# Altium PCB H743ZI_SD_LCD_DRAM_Dev.PcbDoc (part 2 of 2)
Units mm, origin at the board's own origin, x right, y up, seen from the top; angles counter-clockwise.
Board outline 91.52 x 133.34 mm, 2 copper layers (Top Layer, Bottom Layer); 88 components, 125 nets, 598 pads, 322 vias.
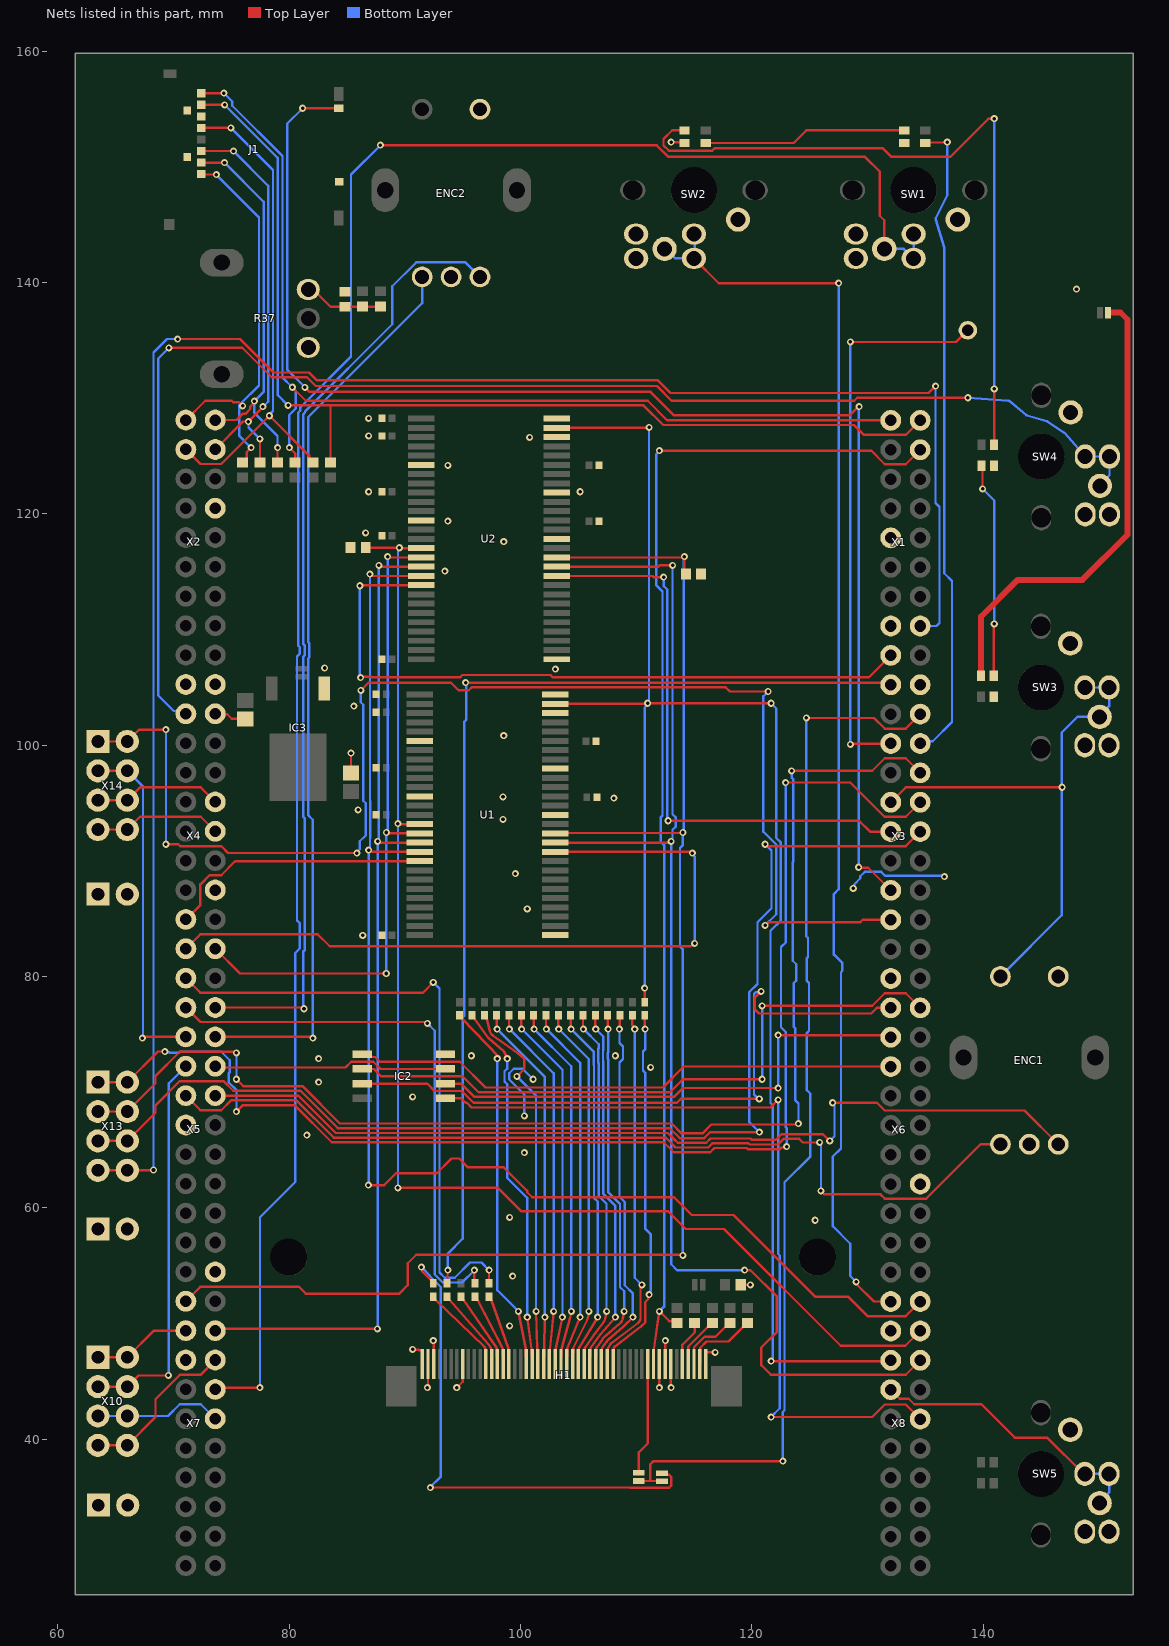
[diagram p2: the nets of this part, all layers, seen from the top]

## Via types
v1: diameter 0.61, hole 0.305, Top Layer to Bottom Layer, tented both sides, 322 vias

## Nets (pads, with @x,y where several pads share a name; then routed paths per layer and width w, separated by ;. In a path a pad name is that pad's centre, name@x,y a point inside that pad or via, vN(x,y) a via of type N, cw(c..) or ccw(c..) an arc to the next point about the centre after c; other vN are vias at no path point) (continued)
D15: R29.2 U1.53 U2.53 X8.5 | length 144.7
  Top Layer w0.203: U1.53@103.005,103.58 110.946,103.58 v1(110.998,103.632) v1(121.666,103.632) ; U2.53@103.124,127.442 111.065,127.442 v1(111.117,127.494) ; R29.2@110.744,77.791 v1(110.744,78.994) ; v1(121.666,46.736) 131.945,46.736 X8.5@132.024,46.815
  Bottom Layer w0.203: v1(110.744,78.994) 110.744,103.268 110.998,103.522 110.998,103.742 111.117,103.861 v1(111.117,127.494) ; v1(121.666,46.736) 121.666,46.846 121.818,46.998 121.818,68.865 121.615,69.068 121.615,83.953 122.52,84.857 122.52,91.587 122.113,91.994 122.113,103.185 v1(121.666,103.632)
GND: C1.2 C2.2 C3.2 C4.2 C5.2 C6.2 C7.2 C8.2 C9.2 C10.2 C11.2 C12.2 C13.2 C14.2 C17.1 C18.1 C19.1 ENC1.2 ENC1.C ENC2.2 ENC2.C H1.1 H1.2 H1.3 H1.8 H1.42 H1.43 H1.44 H1.50 IC2.4 IC3.1 J1.6 J1.9 J1.10 J1.12 R1.1 R2.1 R37.1 R38.1 SW1.2 SW1.S1 SW2.2 SW2.S1 SW3.2 SW3.S1 SW4.2 SW4.S1 SW5.S1 U1.6 U1.12 U1.28 U1.41 U1.46 U1.52 U1.54 U2.6 U2.12 U2.28 U2.41 U2.46 U2.52 U2.54 X1.9 X1.20 X2.8 X2.19 X2.20 X3.19 X4.2 X5.9 X5.20 X6.14 X8.3 X9.1 X9.2 X11.1 X11.2 X12.1 X12.2 | length 38.5
  Top Layer w0.203: X4.2@73.604,102.72 73.648,102.676 74.646,102.676 75.036,102.286 C19.1@76.2,102.286 ; C18.1@85.344,97.612 v1(85.344,99.314) ; v1(90.678,47.752) 90.702,47.728 91.21,47.728 91.258,47.68 91.456,47.68 91.504,47.632 H1.1@91.504,46.482 ; v1(91.948,44.45) 92.004,44.506 H1.2@92.004,46.482 ; v1(92.456,48.514) 92.504,48.466 H1.3@92.504,46.482 ; v1(94.488,44.45) 95.004,44.966 H1.8@95.004,46.482 ; H1.42@112.004,46.482 112.004,44.46 v1(112.014,44.45) ; H1.43@112.504,46.482 112.504,48.496 v1(112.522,48.514) ; H1.44@113.004,46.482 113.004,44.476 v1(113.03,44.45) ; v1(113.03,152.146) 114.113,152.146 SW2.2@114.185,152.074 ; H1.50@116.004,46.482 116.004,47.45 116.052,47.498 v1(116.84,47.498) ; C17.1@119.039,53.34 v1(119.888,53.34)
  Bottom Layer w0.203: v1(100.33,67.949) 100.33,69.793 99.031,71.092 99.031,71.639 99.418,72.026 100.186,72.026 v1(101.092,71.12) ; v1(128.778,87.63) 128.856,87.708 128.856,87.962 129.388,88.494 129.388,88.666 129.774,89.052 131.191,89.052 131.533,88.71 136.588,88.71 v1(136.652,88.646)
  other v1: 99.06,49.784 99.314,54.102 125.476,58.928 99.06,59.182 100.33,64.77 81.534,66.294 90.678,69.596 82.55,70.866 111.252,72.136 82.55,72.898 95.758,73.152 108.204,73.152 86.36,83.566 100.584,85.852 99.568,88.9 98.488,93.589 85.954,94.405 108.081,95.435 98.488,95.544 98.552,100.838 85.598,103.378 103.012,106.585 83.058,106.68 93.472,115.062 98.552,117.602 86.614,118.364 93.726,119.38 86.868,121.92 105.156,121.92 93.726,124.206 100.784,126.63 86.868,126.746 86.868,128.27 148.082,139.446
LDQM: R1.2 U1.15 U2.15 X8.4 | length 113.5
  Top Layer w0.203: R1.2@86.614,117.094 89.513,117.094 v1(89.527,117.08) 89.565,117.042 U2.15@91.424,117.042 ; v1(89.408,61.722) 98.044,61.722 100.076,59.69 112.776,59.69 114.3,58.166 117.602,58.166 127.698,48.07 133.28,48.07 X8.4@134.564,49.355 ; v1(89.408,93.218) 89.446,93.18 U1.15@91.305,93.18
  Bottom Layer w0.203: v1(89.408,61.722) v1(89.408,93.218) 89.408,116.851 89.527,116.97 v1(89.527,117.08)
MY_ADCON: SW4.S2 X4.1 | length 121.5
  Top Layer w0.203: v1(69.596,134.366) 75.946,134.366 78.486,131.826 81.534,131.826 82.296,131.064 111.794,131.064 113.064,129.794 128.86,129.794 129.114,130.048 v1(138.684,130.048)
  Bottom Layer w0.203: v1(69.596,134.366) 68.673,133.443 68.673,104.301 70.01,102.964 70.82,102.964 X4.1@71.064,102.72 ; v1(138.684,130.048) 142.175,129.799 cw(c142.16,129.596) 142.29,129.752 143.731,128.551 ; 143.732,128.551 ccw(c143.861,128.708) 143.804,128.512 145.511,128.025 ; 145.512,128.024 cw(c145.456,127.829) 145.568,127.998 147.043,127.015 cw(c146.931,126.846) 147.084,126.979 SW4.S2@148.834,124.968 SW4.S2@150.934,124.968 150.934,123.356 150.114,122.536 SW4.S2@150.114,122.428
MY_AUDIO_BOOT: ENC1.B X5.8 | length 80
  Top Layer w0.203: X5.8@73.604,69.7 80.805,69.7 84.028,66.476 112.73,66.476 113.352,65.854 113.368,65.854 113.598,65.624 116.065,65.624 116.43,65.989 119.886,65.989 119.988,65.888 122.095,65.888 122.574,66.367 126.165,66.367 v1(126.746,65.786) ; v1(127,69.088) 130.835,69.088 131.504,68.419 143.581,68.419 ENC1.B@146.5,65.5
  Bottom Layer w0.203: v1(126.746,65.786) 127.15,66.19 127.15,68.828 127,68.978 v1(127,69.088)
MY_AUDIO_RST: ENC1.A X5.7 | length 79.9
  Top Layer w0.203: X5.7@71.064,69.7 72.32,68.444 74.124,68.444 74.973,69.293 80.636,69.293 83.86,66.07 112.562,66.07 113.414,65.218 116.233,65.218 116.598,65.583 119.718,65.583 119.82,65.481 122.263,65.481 122.742,65.961 124.099,65.961 124.409,65.651 v1(125.875,65.651) ; v1(125.984,61.468) 126.289,61.163 131.14,61.163 131.504,60.799 135.084,60.799 139.785,65.5 ENC1.A@141.5,65.5
  Bottom Layer w0.203: v1(125.875,65.651) 125.875,65.541 125.984,65.432 v1(125.984,61.468)
MY_CHR1: SW2.S2 X8.1 | length 110.2
  Top Layer w0.203: SW2.S2@115,142.1 117.146,139.954 v1(127.508,139.954) ; v1(129.032,53.594) 129.11,53.516 129.11,53.344 130.559,51.895 X8.1@132.024,51.895
  Bottom Layer w0.203: SW2.S2@112.46,142.92 112.568,142.92 113.388,142.1 SW2.S2@115,142.1 115.062,142.162 115.062,144.018 115,144.08 SW2.S2@115,144.2 ; v1(127.508,139.954) 127.508,87.548 127.102,87.142 127.102,81.894 127.838,81.158 127.838,80.505 127.711,80.378 127.711,65.141 127,64.43 127,58.42 128.524,56.896 128.524,54.102 v1(129.032,53.594)
MY_CHR2: SW1.S2 X7.8 | length 172
  Top Layer w0.203: X7.8@73.604,44.3 73.754,44.45 v1(77.47,44.45) ; v1(87.884,151.892) 111.775,151.892 112.791,150.876 129.794,150.876 131.064,149.606 131.064,145.796 131.46,145.4 SW1.S2@131.46,142.92
  Bottom Layer w0.203: v1(77.47,44.45) 77.47,59.182 80.518,62.23 80.518,82.042 80.924,82.448 80.924,84.602 80.67,84.856 80.67,107.676 80.924,107.93 80.924,108.478 80.772,108.63 80.772,128.75 80.967,128.946 80.967,129.227 85.344,133.604 85.344,149.352 v1(87.884,151.892) ; SW1.S2@131.46,142.92 133.134,142.92 133.954,142.1 SW1.S2@134,142.1 SW1.S2@134,144.2
MY_CHST: ENC1.1 SW3.S2 X3.7 | length 47.5
  Top Layer w0.203: X3.7@132.024,95.075 133.308,96.359 146.828,96.359 v1(146.839,96.371)
  Bottom Layer w0.203: ENC1.1@141.5,80 146.812,85.312 146.812,101.092 148.18,102.46 SW3.S2@150.08,102.46 150.08,102.568 150.9,103.388 SW3.S2@150.9,105 SW3.S2@148.8,105
MY_FOOT1: SW5.S2 X8.7 | length 24.8
  Top Layer w0.203: X8.7@132.024,44.275 132.805,43.494 133.569,43.494 134.044,43.019 139.861,43.019 142.748,40.132 145.542,40.132 148.674,37 SW5.S2@148.8,37
  Bottom Layer w0.203: SW5.S2@148.8,37 SW5.S2@150.9,37 150.9,35.388 150.08,34.568 SW5.S2@150.08,34.46
MY_FOOT2: ENC2.A X5.4 | length 78.6
  Top Layer w0.203: X5.4@73.604,74.78 81.828,74.78 81.932,74.676 v1(82.042,74.676)
  Bottom Layer w0.203: v1(82.042,74.676) 82.042,93.554 81.636,93.96 81.636,107.492 81.737,107.594 81.737,108.814 81.636,108.916 81.636,128.372 91.5,138.236 ENC2.A@91.5,140.5
MY_FOOT3: ENC2.B X5.2 | length 82.5
  Top Layer w0.203: X5.2@73.604,77.32 81.176,77.32 v1(81.28,77.216)
  Bottom Layer w0.203: v1(81.28,77.216) 81.229,77.267 81.229,82.178 81.331,82.28 81.331,93.691 81.229,93.792 81.229,107.661 81.331,107.762 81.331,108.646 81.229,108.747 81.229,128.633 81.374,128.777 81.374,128.872 88.912,136.41 88.912,139.688 90.98,141.756 95.245,141.756 ENC2.B@96.5,140.5
MY_LCD_RESET: H1.41 R30.1 X1.4 | length 105.2
  Top Layer w0.203: H1.41@111.504,46.482 111.549,47.68 111.549,47.782 cw(c111.854,47.782) 111.552,47.825 v1(112.014,51.054) 112.877,50.191 113.385,50.191 R30.1@113.538,50.038 ; v1(112.014,125.476) 130.327,125.476 131.504,124.299 133.308,124.299 X1.4@134.564,125.555
  Bottom Layer w0.203: v1(112.014,51.054) 112.42,51.46 112.42,91.37 112.116,91.674 112.116,93.746 112.285,93.915 112.285,113.29 111.727,113.848 111.727,125.131 112.014,125.419 v1(112.014,125.476)
MY_LCD_TE_EXTI2: J3.2 J4.2 X3.2 | length 91.5
  Top Layer w0.203: J4.2@110.236,36.384 111.221,36.384 ; J3.2@112.268,36.322 112.206,36.384 111.221,36.384 ; v1(122.682,38.1) 111.506,38.1 111.221,37.815 111.221,36.384 ; v1(124.714,102.362) 130.581,102.362 131.504,101.439 133.308,101.439 X3.2@134.564,102.695
  Bottom Layer w0.203: v1(122.682,38.1) 122.682,42.351 122.834,42.504 122.834,62.21 125.07,64.446 125.07,69.87 124.765,70.174 124.765,75.122 124.956,75.313 124.956,79.432 124.766,79.622 124.766,81.603 124.866,81.703 124.866,83.332 124.714,83.484 v1(124.714,102.362)
MY_SD_DETECT: J1.11 X3.13 | length 121.2
  Top Layer w0.203: v1(81.17,155.084) J1.11@84.29,155.084 ; v1(81.358,130.951) 81.753,130.556 111.252,130.556 113.284,128.524 128.456,128.524 129.218,129.286 v1(129.286,129.286) ; v1(129.241,89.453) 129.286,89.408 130.071,89.408 X3.13@132.024,87.455
  Bottom Layer w0.203: v1(81.17,155.084) 79.823,153.737 79.823,132.487 v1(81.358,130.951) ; v1(129.241,89.453) 129.264,89.475 129.264,129.264 v1(129.286,129.286)
NE1: R10.2 X1.19 | length 89.5
  Top Layer w0.203: R10.2@93.662,53.474 93.694,53.506 93.694,54.578 v1(93.726,54.61) ; v1(95.25,105.41) 131.849,105.41 X1.19@132.024,105.235
  Bottom Layer w0.203: v1(93.726,54.61) 93.726,56.048 94.996,57.318 94.996,76.454 95.148,76.606 95.148,102.026 95.301,102.178 95.301,105.359 v1(95.25,105.41)
NE4: X7.5
NetH1_12: H1.12 R9.1 | length 7.7
  Top Layer w0.203: R9.1@92.456,52.324 92.654,52.051 96.865,48.002 cw(c96.654,47.782) 96.959,47.782 96.959,47.68 H1.12@97.004,46.482
NetH1_13: H1.13 R10.1 | length 7.2
  Top Layer w0.203: R10.1@93.662,52.324 93.861,52.051 97.189,48.251 cw(c96.654,47.782) 97.232,48.196 97.402,47.96 cw(c97.154,47.782) 97.459,47.782 97.459,47.68 H1.13@97.504,46.482
NetH1_14: H1.14 R11.1 | length 6.8
  Top Layer w0.203: R11.1@94.869,52.324 95.067,52.051 97.905,47.956 cw(c97.654,47.782) 97.959,47.782 97.959,47.68 H1.14@98.004,46.482
NetH1_15: H1.15 R12.1 | length 6.4
  Top Layer w0.203: R12.1@96.075,52.324 96.274,52.051 98.424,47.923 cw(c98.154,47.782) 98.459,47.782 98.459,47.68 H1.15@98.504,46.482
NetH1_16: H1.16 R13.1 | length 6.2
  Top Layer w0.203: R13.1@97.282,52.324 97.48,52.051 98.942,47.883 cw(c98.654,47.782) 98.959,47.782 98.959,47.68 H1.16@99.004,46.482
NetH1_19: H1.19 R14.1 | length 32.4
  Top Layer w0.203: R14.1@94.742,76.641 94.94,76.368 98.151,73.05 97.998,72.898 v1(97.993,72.898) ; v1(99.822,51.054) 99.934,50.429 ccw(c100.584,50.546) 99.936,50.416 100.453,47.842 cw(c100.154,47.782) 100.459,47.782 100.459,47.68 H1.19@100.504,46.482
  Bottom Layer w0.203: v1(97.993,72.898) 97.993,52.883 v1(99.822,51.054)
NetH1_20: H1.20 R15.1 | length 32.2
  Top Layer w0.203: R15.1@95.809,76.641 96.007,76.368 97.108,74.836 ccw(c97.974,75.458) 97.278,74.65 98.541,73.564 cw(c98.408,73.409) 98.594,73.492 v1(98.857,72.898) ; v1(100.584,50.546) 100.956,47.823 cw(c100.654,47.782) 100.959,47.782 100.959,47.68 H1.20@101.004,46.482
  Bottom Layer w0.203: v1(98.857,72.898) 98.857,72.039 98.625,71.807 98.625,70.924 98.857,70.692 98.857,62.586 100.584,60.858 v1(100.584,50.546)
NetH1_21: H1.21 R16.1 | length 32.7
  Top Layer w0.203: R16.1@96.876,76.641 97.074,76.368 97.333,75.302 ccw(c97.974,75.458) 97.594,74.918 99.694,73.438 cw(c99.314,72.898) 99.743,73.4 100.259,72.959 cw(c100.127,72.804) 100.33,72.804 100.33,72.004 v1(99.692,71.365) ; v1(101.346,51.054) 101.459,47.793 cw(c101.154,47.782) 101.459,47.782 101.459,47.68 H1.21@101.504,46.482
  Bottom Layer w0.203: v1(99.692,71.365) 101.346,69.711 v1(101.346,51.054)
NetH1_22: H1.22 R17.1 | length 31.9
  Top Layer w0.203: R17.1@97.942,76.641 97.942,75.49 v1(97.974,75.458) ; H1.22@102.004,46.482 102.049,47.68 102.049,47.782 cw(c102.354,47.782) 102.049,47.788 v1(102.108,50.546)
  Bottom Layer w0.203: v1(97.974,75.458) 102.108,71.324 v1(102.108,50.546)
NetH1_23: H1.23 R18.1 | length 31.7
  Top Layer w0.203: v1@99.009,75.49 R18.1@99.009,76.641 ; H1.23@102.504,46.482 102.549,47.68 102.549,47.782 cw(c102.854,47.782) 102.551,47.812 v1(102.87,51.054)
  Bottom Layer w0.203: v1(99.041,75.458) 102.87,71.629 v1(102.87,51.054)
NetH1_24: H1.24 R19.1 | length 31.6
  Top Layer w0.203: v1@100.076,75.49 R19.1@100.076,76.641 ; H1.24@103.004,46.482 103.049,47.68 103.049,47.782 cw(c103.354,47.782) 103.056,47.846 v1(103.632,50.546)
  Bottom Layer w0.203: v1(100.108,75.458) 103.632,71.934 v1(103.632,50.546)
NetH1_25: H1.25 R20.1 | length 31.6
  Top Layer w0.203: v1@101.143,75.49 R20.1@101.143,76.641 ; H1.25@103.504,46.482 103.549,47.68 103.549,47.782 cw(c103.854,47.782) 103.561,47.865 104.268,50.366 ccw(c103.632,50.546) 104.282,50.429 v1(104.394,51.054)
  Bottom Layer w0.203: v1(101.175,75.458) 104.394,72.239 v1(104.394,51.054)
NetH1_26: H1.26 R21.1 | length 31.6
  Top Layer w0.203: R21.1@102.21,76.641 102.21,75.49 v1(102.242,75.458) ; H1.26@104.004,46.482 104.049,47.68 104.049,47.782 cw(c104.354,47.782) 104.072,47.897 v1(105.156,50.546)
  Bottom Layer w0.203: v1(102.242,75.458) 105.156,72.544 v1(105.156,50.546)
NetH1_27: H1.27 R22.1 | length 31.5
  Top Layer w0.203: v1@103.276,75.49 R22.1@103.276,76.641 ; H1.27@104.504,46.482 104.549,47.68 104.549,47.782 cw(c104.854,47.782) 104.581,47.918 105.747,50.251 ccw(c105.156,50.546) 105.806,50.429 v1(105.918,51.054)
  Bottom Layer w0.203: v1(103.308,75.458) 105.918,72.848 v1(105.918,51.054)
NetH1_28: H1.28 R23.1 | length 31.5
  Top Layer w0.203: v1@104.343,75.49 R23.1@104.343,76.641 ; H1.28@105.004,46.482 105.049,47.68 105.049,47.782 cw(c105.354,47.782) 105.094,47.941 v1(106.68,50.546)
  Bottom Layer w0.203: v1(104.375,75.458) 106.324,73.509 106.324,72.373 106.356,72.341 106.356,60.863 106.68,60.54 v1(106.68,50.546)
NetH1_29: H1.29 R24.1 | length 31.6
  Top Layer w0.203: v1@105.41,75.49 R24.1@105.41,76.641 ; H1.29@105.504,46.482 105.549,47.68 105.549,47.782 cw(c105.854,47.782) 105.606,47.96 106.455,49.144 cw(c108.354,47.782) 106.484,49.183 107.208,50.15 ccw(c106.68,50.546) 107.33,50.429 v1(107.442,51.054)
  Bottom Layer w0.203: v1(105.442,75.458) 106.763,74.137 106.763,73.794 106.731,73.762 106.731,72.542 106.763,72.51 106.763,61.032 107.442,60.352 v1(107.442,51.054)
NetH1_30: H1.30 R25.1 | length 31.7
  Top Layer w0.203: H1.30@106.004,46.482 106.049,47.68 106.049,47.782 cw(c106.354,47.782) 106.106,47.96 106.785,48.907 cw(c108.354,47.782) 106.9,49.051 v1(108.204,50.546) ; R25.1@106.477,76.641 106.477,75.49 v1(106.509,75.458)
  Bottom Layer w0.203: v1(106.509,75.458) 107.169,74.798 107.169,73.626 107.137,73.594 107.137,72.71 107.169,72.678 107.169,61.2 108.204,60.165 v1(108.204,50.546)
NetH1_31: H1.31 R26.1 | length 31.7
  Top Layer w0.203: H1.31@106.504,46.482 106.549,47.68 106.549,47.782 cw(c106.854,47.782) 106.606,47.96 106.946,48.434 107.115,48.67 cw(c108.354,47.782) 107.354,48.932 108.636,50.047 ccw(c108.204,50.546) 108.854,50.429 v1(108.966,51.054) ; v1@107.544,75.49 R26.1@107.544,76.641
  Bottom Layer w0.203: v1(107.576,75.458) 107.576,73.458 107.544,73.426 107.544,72.878 107.576,72.846 107.576,61.368 108.61,60.334 108.61,53.136 108.966,52.781 v1(108.966,51.054)
NetH1_32: H1.32 R27.1 | length 32
  Top Layer w0.203: H1.32@107.004,46.482 107.049,47.68 107.049,47.782 cw(c107.354,47.782) 107.106,47.96 107.276,48.196 cw(c107.606,47.96) 107.277,48.197 107.446,48.433 cw(c108.354,47.782) 107.621,48.625 108.904,49.741 ccw(c108.204,50.546) 108.951,49.784 109.723,50.541 v1(109.718,50.546) ; v1(108.56,75.458) 108.585,75.484 108.585,76.616 R27.1@108.61,76.641
  Bottom Layer w0.203: v1(108.56,75.458) 108.56,74.266 108.864,73.961 108.864,72.878 108.56,72.574 108.56,60.959 109.017,60.502 109.017,53.305 109.718,52.604 v1(109.718,50.546)
NetH1_33: H1.33 R28.1 | length 31.8
  Top Layer w0.203: H1.33@107.504,46.482 107.549,47.68 107.549,47.782 cw(c107.854,47.782) 107.606,47.96 107.776,48.196 cw(c108.354,47.782) 107.925,48.349 110.126,50.019 ccw(c109.728,50.546) 110.189,50.073 110.201,50.085 ccw(c109.728,50.546) 110.378,50.429 110.378,53.018 110.412,53.052 110.412,53.262 v1(110.49,53.34) ; R28.1@109.677,76.641 109.677,75.771 109.88,75.568 v1(109.88,75.458)
  Bottom Layer w0.203: v1(109.88,75.458) 109.88,53.95 v1(110.49,53.34)
NetH1_34: H1.34 R29.1 | length 32
  Top Layer w0.203: H1.34@108.004,46.482 108.049,47.68 108.049,47.782 cw(c108.354,47.782) 108.17,48.025 110.373,49.696 ccw(c109.728,50.546) 110.475,49.784 110.784,50.094 110.784,51.856 111.055,52.127 111.055,52.423 v1(111.133,52.5) ; v1@110.744,75.49 R29.1@110.744,76.641
  Bottom Layer w0.203: v1(110.776,75.458) 110.776,73.697 110.592,73.513 110.592,71.862 110.776,71.678 110.776,58.216 111.252,57.74 111.252,52.823 111.211,52.781 111.211,52.578 v1(111.133,52.5)
NetH1_46: H1.46 R31.1 | length 4
  Top Layer w0.203: H1.46@114.004,46.482 114.004,48.169 115.062,49.226 R31.1@115.062,50.038
NetH1_47: H1.47 R32.1 | length 4.5
  Top Layer w0.203: H1.47@114.504,46.482 114.504,48.013 116.206,49.715 116.263,49.715 R32.1@116.586,50.038
NetH1_48: H1.48 R33.1 | length 5.4
  Top Layer w0.203: H1.48@115.004,46.482 115.004,47.938 115.915,48.849 116.871,48.849 118.06,50.038 R33.1@118.11,50.038
NetH1_49: H1.49 R34.1 | length 6.4
  Top Layer w0.203: H1.49@115.504,46.482 115.549,46.527 115.549,47.908 116.083,48.442 117.988,48.442 119.584,50.038 R34.1@119.634,50.038
NetJ3_1: J3.1 R9.2 | length 44.6
  Top Layer w0.203: v1(91.428,54.873) 91.506,54.795 91.506,54.499 92.456,53.549 R9.2@92.456,53.474 ; v1(92.202,35.814) 109.466,35.814 109.482,35.798 112.863,35.798 113.042,35.977 113.042,36.729 112.863,36.908 112.382,36.908 J3.1@112.237,37.053
  Bottom Layer w0.203: v1(91.428,54.873) 92.151,54.15 92.151,54.101 93.116,53.136 93.116,36.778 92.202,35.863 v1(92.202,35.814)
NetJ5_2: J5.2 SW3.4 | length 40.9
  Top Layer w0.508: SW3.4@139.826,106.015 139.826,111.124 143.002,114.3 148.59,114.3 152.492,118.202 152.492,136.814 151.892,137.414 151.13,137.414
NetR35_1: R35.1 R36.1 R37.3 R38.2 | length 6.9
  Top Layer w0.203: R37.3@81.65,139.406 82.082,139.406 83.566,137.922 R38.2@84.836,137.922 87.854,137.922 R36.1@87.884,137.952
NetSW1_1: SW1.1 SW2.3 | length 17.6
  Top Layer w0.203: SW2.3@116.015,152.074 123.626,152.074 124.726,153.174 SW1.1@133.185,153.174
NetSW2_1: SW2.1 SW4.3 | length 61.4
  Top Layer w0.203: SW2.1@114.185,153.174 113.124,153.174 112.37,152.42 112.37,151.872 112.823,151.419 116.591,151.419 116.81,151.638 131.318,151.638 132.08,150.876 137.16,150.876 140.462,154.178 v1(140.97,154.178) ; SW4.3@140.96,125.983 140.96,130.8 v1(140.97,130.81)
  Bottom Layer w0.203: v1(140.97,130.81) v1(140.97,154.178)
NetSW3_3: SW3.3 SW4.1 | length 18.7
  Top Layer w0.203: SW4.1@139.86,124.153 139.954,124.059 v1(139.954,122.174) ; SW3.3@140.97,106.059 SW3.3@140.926,106.015 140.926,110.446 v1(140.97,110.49)
  Bottom Layer w0.203: v1(139.954,122.174) 140.97,121.158 v1(140.97,110.49)
NOE: R13.2 X4.19 | length 54
  Top Layer w0.203: X4.19@71.064,79.86 72.32,78.604 91.558,78.604 v1(92.456,79.502) ; R13.2@97.282,53.474 v1(97.282,54.61)
  Bottom Layer w0.203: v1(92.456,79.502) 92.993,78.965 92.993,54.409 93.452,53.95 94.322,53.95 95.642,55.27 96.622,55.27 v1(97.282,54.61)
NWE: R12.2 X5.1 | length 48.7
  Top Layer w0.203: X5.1@71.064,77.32 72.32,76.064 91.83,76.064 v1(91.948,75.946) ; v1(96.012,54.61) 96.012,53.537 R12.2@96.075,53.474
  Bottom Layer w0.203: v1(91.948,75.946) 92.587,75.307 92.587,54.241 93.284,53.543 94.945,53.543 v1(96.012,54.61)
QUADSPI_BK1_IO0: IC2.5 X6.5 | length 47.6
  Top Layer w0.203: IC2.5@86.316,73.279 86.539,73.056 87.148,73.056 87.158,73.045 87.436,73.045 87.842,72.639 94.747,72.639 96.977,70.409 112.319,70.409 114.125,72.215 X6.5@132.024,72.215
QUADSPI_BK1_IO1: IC2.2 X6.3 | length 43.9
  Top Layer w0.203: IC2.2@93.516,70.739 94.869,70.739 96.012,69.596 113.284,69.596 114.046,70.358 v1(122.276,70.358) ; v1(122.276,74.93) 131.849,74.93 X6.3@132.024,74.755
  Bottom Layer w0.203: v1(122.276,70.358) v1(122.276,74.93)
QUADSPI_BK1_IO2: IC2.3 X5.6 | length 20.4
  Top Layer w0.203: X5.6@73.604,72.24 73.708,72.136 84.862,72.136 85.365,72.639 87.267,72.639 87.897,72.009 IC2.3@93.516,72.009
QUADSPI_BK1_IO3: IC2.7 X6.1 | length 59
  Top Layer w0.203: IC2.7@86.316,70.739 91.935,70.739 92.565,70.109 94.924,70.109 95.945,69.088 113.538,69.088 113.868,69.418 v1(120.646,69.418) ; v1(120.807,78.713) 120.244,78.15 120.244,77.196 120.63,76.81 130.338,76.81 130.823,77.295 X6.1@132.024,77.295
  Bottom Layer w0.203: v1(120.646,69.418) 120.574,69.418 120.193,69.799 120.193,78.486 120.36,78.653 120.747,78.653 v1(120.807,78.713)
QUADSPI_BK1_NCS: IC2.1 X8.10 | length 71
  Top Layer w0.203: IC2.1@93.516,69.469 94.869,69.469 95.25,69.088 95.371,69.088 95.777,68.682 121.615,68.682 v1(122.276,69.342) ; v1(121.666,41.91) 130.423,41.91 131.504,42.99 133.308,42.99 X8.10@134.564,41.735
  Bottom Layer w0.203: v1(121.666,41.91) 122.428,42.672 122.428,55.876 122.276,56.028 v1(122.276,69.342)
QUADSPI_CLK: IC2.6 X6.2 | length 56.9
  Top Layer w0.203: IC2.6@86.316,72.009 86.32,72.005 87.327,72.005 87.963,71.369 95.001,71.369 96.368,70.002 112.928,70.002 114.046,71.12 v1(120.904,71.12) ; v1(120.904,77.47) 130.423,77.47 131.504,78.55 133.308,78.55 X6.2@134.564,77.295
  Bottom Layer w0.203: v1(120.904,71.12) v1(120.904,77.47)
SD_CK: J1.5 R8.1 X2.3 | length 44.2
  Top Layer w0.203: X2.3@71.064,125.58 72.32,124.324 74.124,124.324 v1(78.294,128.494) 81.723,125.065 81.723,124.779 R8.1@82.042,124.46 ; J1.5@72.39,153.384 v1(74.962,153.384)
  Bottom Layer w0.203: v1(74.962,153.384) 78.603,149.743 78.603,128.913 78.294,128.604 v1(78.294,128.494)
SD_CMD: J1.3 R3.1 X2.4 | length 35.8
  Top Layer w0.203: J1.3@72.39,151.384 v1(75.184,151.384) ; X2.4@73.604,125.58 76.017,127.993 v1(76.477,127.993) 77.724,129.24 v1(77.724,129.286) ; R3.1@77.47,124.46 v1(77.47,126.492)
  Bottom Layer w0.203: v1(75.184,151.384) 78.197,148.371 78.197,129.713 v1@77.888,129.404 ; v1(76.477,127.993) 76.477,127.485 v1(77.47,126.492)
SD_D0: J1.7 R7.1 X1.2 | length 91.5
  Top Layer w0.203: J1.7@72.39,155.384 v1(74.419,155.384) ; v1(79.9,129.388) 83.566,129.388 ; R7.1@83.566,124.46 83.566,129.388 ; X1.2@134.564,128.095 133.308,126.839 129.701,126.839 128.852,127.688 112.342,127.688 110.642,129.388 83.566,129.388
  Bottom Layer w0.203: v1(74.419,155.384) 79.01,150.794 79.01,130.278 v1(79.9,129.388)
SD_D1: J1.8 R6.1 X1.1 | length 89.8
  Top Layer w0.203: J1.8@72.39,156.384 v1(74.353,156.384) ; v1(80.01,125.73) 80.518,125.222 R6.1@80.518,124.46 ; v1(80.271,130.958) 81.436,129.794 110.998,129.794 112.697,128.095 X1.1@132.024,128.095
  Bottom Layer w0.203: v1(74.353,156.384) 75.08,155.658 75.08,155.298 79.416,150.962 79.416,131.813 v1(80.271,130.958) 80.271,130.906 80.561,130.616 80.561,129.114 80.01,128.563 v1(80.01,125.73)
SD_D2: J1.1 R5.1 X2.1 | length 35.3
  Top Layer w0.203: X2.1@71.064,128.12 72.738,129.794 75.032,129.794 75.171,129.654 75.665,129.654 v1(75.972,129.347) ; J1.1@72.39,149.384 72.422,149.352 v1(73.711,149.352) ; R5.1@75.946,124.46 75.996,124.46 76.319,124.783 76.319,125.341 v1(76.708,125.73)
  Bottom Layer w0.203: v1(73.711,149.352) 73.711,149.301 77.384,145.628 77.384,131.118 v1@75.793,129.527 ; v1(75.972,129.347) v1@75.793,129.527 ; v1(76.708,125.73) 75.692,126.746 75.692,129.426 v1@75.793,129.527
SD_D3: J1.2 R4.1 X2.2 | length 34.8
  Top Layer w0.203: J1.2@72.39,150.384 v1(74.406,150.384) ; X2.2@73.604,128.12 75.436,128.12 75.969,128.653 76.212,128.653 76.633,129.074 76.633,129.291 76.994,129.652 v1(76.994,129.762) ; R4.1@78.994,124.46 v1(78.994,125.73)
  Bottom Layer w0.203: v1(74.406,150.384) 77.791,146.999 77.791,130.559 v1(76.994,129.762) 76.994,128.742 78.994,126.742 v1(78.994,125.73)
SDCKE0: U1.37 X4.17 | length 64.8
  Top Layer w0.203: X4.17@71.064,82.4 72.32,83.655 82.461,83.655 83.501,82.615 114.739,82.615 114.993,82.869 v1(115.062,82.869) ; U1.37@103.005,90.78 114.647,90.78 114.749,90.678 v1(114.859,90.678)
  Bottom Layer w0.203: v1(114.859,90.678) 114.859,90.568 115.062,90.365 v1(115.062,82.869)
SDCKE1: U2.37 X3.9 | length 50.2
  Top Layer w0.203: U2.37@103.124,114.642 111.413,114.642 111.515,114.54 v1(112.387,114.54) ; v1(112.776,93.472) 129.286,93.472 130.223,92.535 X3.9@132.024,92.535
  Bottom Layer w0.203: v1(112.387,114.54) 112.387,113.763 112.692,113.458 112.692,93.556 v1(112.776,93.472)
SDCLK: U1.38 U2.38 X8.6 | length 111.7
  Top Layer w0.203: U1.38@103.005,91.58 v1@112.806,91.58 ; U2.38@103.124,115.442 111.909,115.442 112.023,115.556 v1(113.149,115.556) ; v1(119.38,54.61) 119.888,54.61 122.174,52.324 122.174,49.276 120.818,47.92 120.818,46.396 121.655,45.559 133.308,45.559 X8.6@134.564,46.815
  Bottom Layer w0.203: v1(113.03,91.694) 113.03,55.118 113.538,54.61 v1(119.38,54.61) ; v1@113.149,91.923 113.149,92.691 113.436,92.978 113.436,93.746 113.149,94.033 v1(113.149,115.556)
SDNCAS: U1.17 U2.17 X7.4 | length 87.3
  Top Layer w0.203: X7.4@73.604,49.38 73.754,49.53 v1(87.63,49.53) ; v1(87.749,115.556) 87.859,115.556 87.973,115.442 U2.17@91.424,115.442 ; v1@87.854,91.58 U1.17@91.305,91.58
  Bottom Layer w0.203: v1(87.63,49.53) 87.647,49.547 87.647,61.713 87.66,61.726 87.66,62.274 87.647,62.287 v1(87.647,91.694) 87.647,91.804 87.749,91.906 v1(87.749,115.556)
SDNE0: U1.19 X4.15 | length 23.4
  Top Layer w0.203: X4.15@71.064,84.94 72.32,86.195 72.32,87.971 73.113,88.764 74.124,88.764 75.34,89.98 U1.19@91.305,89.98
SDNE1: U2.19 X1.17 | length 60.2
  Top Layer w0.203: v1(86.106,113.792) 86.156,113.842 U2.19@91.424,113.842 ; v1(86.173,105.851) 86.239,105.918 87.094,105.918 87.145,105.867 94.767,105.867 94.971,106.07 102.593,106.07 102.796,105.867 130.116,105.867 X1.17@132.024,107.775
  Bottom Layer w0.203: v1(86.106,113.792) 86.106,105.918 v1(86.173,105.851)
SDNRAS: U1.18 U2.18 X8.2 | length 116.5
  Top Layer w0.203: v1(86.841,61.96) 88.208,61.96 89.24,62.992 92.756,62.992 93.951,64.187 93.966,64.187 94.045,64.266 94.706,64.266 95.472,63.5 98.552,63.5 100.584,61.468 100.584,61.345 101.019,60.909 113.281,60.909 114.805,59.385 118.415,59.385 125.476,52.324 128.334,52.324 130.019,50.639 133.308,50.639 X8.2@134.564,51.895 ; v1(86.987,114.794) 87.097,114.794 87.249,114.642 U2.18@91.424,114.642 ; v1@87.13,90.78 U1.18@91.305,90.78
  Bottom Layer w0.203: v1(86.841,61.96) 86.868,61.987 v1(86.868,90.932) 86.868,91.042 86.987,91.161 86.987,92 87.02,92.034 87.02,95.164 86.987,95.198 v1(86.987,114.794)
SDNWE: U1.16 U2.16 X4.18 | length 57.6
  Top Layer w0.203: X4.18@73.604,82.4 75.74,80.264 v1(88.392,80.264) ; v1(88.409,92.456) 88.485,92.38 U1.16@91.305,92.38 ; v1(88.511,116.318) 88.587,116.242 U2.16@91.424,116.242
  Bottom Layer w0.203: v1(88.392,80.264) 88.392,92.439 v1(88.409,92.456) 88.409,92.566 88.511,92.668 v1(88.511,116.318)
SPI1_MISO: X7.3 X10.1 X10.2 | length 8.6
  Top Layer w0.203: X10.1@63.46,47.08 X10.2@66,47.08 68.3,49.38 X7.3@71.064,49.38
SPI1_MOSI: X5.5 X10.3 X10.4 | length 33.9
  Top Layer w0.203: X10.3@63.46,44.54 X10.4@66,44.54 66.964,45.504 v1(69.558,45.504)
  Bottom Layer w0.203: v1(69.558,45.504) 69.596,45.541 69.596,70.772 X5.5@71.064,72.24
SPI1_NSS: X7.6 X10.7 X10.8 | length 14.1
  Top Layer w0.203: X10.7@63.46,39.46 X10.8@66,39.46 68.444,41.904 68.444,43.455 70.544,45.555 72.32,45.555 X7.6@73.604,46.84
SPI1_SCK: X7.10 X10.5 X10.6 | length 11.1
  Bottom Layer w0.203: X10.5@63.46,42 X10.6@66,42 69.528,42 70.544,43.015 72.348,43.015 X7.10@73.604,41.76
SPI2_MISO: X3.8 X13.1 X13.2 | length 112.6
  Top Layer w0.203: X13.1@63.46,70.866 X13.2@66,70.866 68.647,73.513 v1(69.246,73.513) ; v1(75.438,68.326) 75.997,68.885 80.467,68.885 83.689,65.663 112.391,65.663 112.776,65.278 112.779,65.278 113.246,64.811 116.405,64.811 116.77,65.176 119.55,65.176 119.651,65.075 122.431,65.075 122.579,65.222 122.938,65.222 v1(123.016,65.3) ; v1(122.936,96.774) 128.524,96.774 131.479,93.819 133.308,93.819 X3.8@134.564,95.075
  Bottom Layer w0.203: v1(69.246,73.513) 69.318,73.441 69.63,73.441 69.664,73.406 70.454,73.406 70.544,73.495 74.124,73.495 74.86,72.76 74.86,71.72 74.778,71.638 74.778,70.846 75.438,70.186 v1(75.438,68.326) ; v1(122.936,96.774) 122.936,82.956 122.53,82.55 122.53,75.61 122.936,75.204 122.936,66.954 123.016,66.875 v1(123.016,65.3)
SPI2_MOSI: X3.6 X13.3 X13.4 | length 110.8
  Top Layer w0.203: X13.3@63.46,68.326 X13.4@66,68.326 68.444,70.77 68.444,71.395 70.544,73.495 75.239,73.495 75.328,73.406 v1(75.438,73.406) ; v1(75.438,71.12) 76.034,70.524 81.146,70.524 84.381,67.289 113.083,67.289 113.935,66.437 115.728,66.437 116.5,67.208 123.969,67.208 v1(124.039,67.279) ; v1(123.444,97.79) 130.423,97.79 131.504,98.87 133.308,98.87 X3.6@134.564,97.615
  Bottom Layer w0.203: v1(75.438,71.12) v1(75.438,73.406) ; v1(123.444,97.79) 123.444,97.2 123.596,97.048 123.596,89.941 123.546,89.891 123.546,81.368 123.85,81.064 123.85,79.647 123.635,79.432 123.635,75.654 123.749,75.54 123.749,69.322 124.039,69.032 v1(124.039,67.279)
SPI2_NSS: X1.16 X13.7 X13.8 | length 168.2
  Top Layer w0.203: X13.7@63.46,63.246 X13.8@66,63.246 66.012,63.258 68.254,63.258 v1(68.267,63.271) ; v1(70.358,135.128) 75.759,135.128 78.654,132.232 81.702,132.232 82.363,131.572 111.861,131.572 112.979,130.454 135.28,130.454 v1(135.89,131.064)
  Bottom Layer w0.203: v1(68.267,63.271) 68.267,133.97 69.424,135.128 v1(70.358,135.128) ; X1.16@134.564,110.315 135.969,110.315 136.236,110.582 136.236,120.595 135.89,120.941 v1(135.89,131.064)
SPI2_SCK: X3.10 X13.5 X13.6 | length 102.2
  Top Layer w0.203: X13.5@63.46,65.786 X13.6@66,65.786 68.444,68.23 68.444,68.855 70.544,70.955 74.333,70.955 75.171,70.117 80.978,70.117 84.212,66.883 112.914,66.883 113.766,66.03 115.897,66.03 116.414,66.548 v1(120.65,66.548) ; v1(121.158,91.44) 121.268,91.44 121.429,91.279 133.308,91.279 X3.10@134.564,92.535
  Bottom Layer w0.203: v1(120.65,66.548) 119.786,67.412 119.786,78.654 120.498,79.366 120.498,84.703 121.707,85.912 121.707,90.891 v1(121.158,91.44)
TIM8_CH1N: X1.15
TIM8_CH2N: X4.14
TIM8_CH3N: SW1.3 X3.4 | length 56.2
  Top Layer w0.203: SW1.3@135.015,152.074 135.363,152.087 v1(136.906,152.146)
  Bottom Layer w0.203: X3.4@134.564,100.155 134.753,100.344 135.65,100.344 137.312,102.006 137.312,114.206 136.652,114.867 136.652,142.972 ccw(c136.449,142.972) 136.643,143.031 135.913,145.465 ; 135.913,145.465 cw(c136.108,145.523) 135.926,145.614 136.885,147.531 ccw(c136.703,147.622) 136.906,147.622 v1(136.906,152.146)
UART4_RX: X4.10 X14.7 X14.8 | length 11.1
  Top Layer w0.203: X14.7@63.46,92.71 X14.8@66,92.71 67.105,93.815 72.348,93.815 X4.10@73.604,92.56
UART4_TX: X4.8 X14.5 X14.6 | length 11.1
  Top Layer w0.203: X14.5@63.46,95.25 X14.6@66,95.25 67.105,96.355 72.348,96.355 X4.8@73.604,95.1
UDQM: R2.2 U1.39 U2.39 X7.1 | length 130.7
  Top Layer w0.203: X7.1@71.064,51.92 72.32,53.175 80.844,53.175 81.434,52.585 89.526,52.585 90.256,53.315 90.256,55.21 90.986,55.94 113.986,55.94 v1(114.046,55.88) ; U1.39@103.005,92.38 103.043,92.418 114.008,92.418 v1(114.046,92.456) ; U2.39@103.124,116.242 114.089,116.242 v1(114.165,116.318) 114.165,114.943 R2.2@114.3,114.808
  Bottom Layer w0.203: v1(114.046,55.88) 114.046,82.335 113.792,82.589 113.792,91.12 114.046,91.374 v1(114.046,92.456) 114.105,92.515 114.105,116.258 v1(114.165,116.318)
USART2_RX: X5.3 X14.3 X14.4 | length 30
  Top Layer w0.203: X14.3@63.46,97.79 X14.4@66,97.79 ; v1(67.31,74.676) 67.42,74.676 67.524,74.78 X5.3@71.064,74.78
  Bottom Layer w0.203: X14.4@66,97.79 67.356,96.434 67.356,74.722 v1(67.31,74.676)
USART2_TX: X3.15 X14.1 X14.2 | length 115.9
  Top Layer w0.203: X14.1@63.46,100.33 X14.2@66,100.33 67.016,101.346 v1(69.342,101.346) ; v1(69.342,91.44) 70.408,91.44 70.573,91.275 74.124,91.275 74.722,90.678 v1(85.852,90.678) ; v1(86.193,104.75) 86.208,104.75 86.868,105.41 93.98,105.41 94.64,104.75 95.524,104.75 95.778,105.004 117.754,105.004 118.11,104.648 v1(121.412,104.648) ; v1(121.158,84.43) 121.226,84.43 121.48,84.684 129.372,84.684 129.604,84.915 X3.15@132.024,84.915
  Bottom Layer w0.203: v1(69.342,91.44) v1(69.342,101.346) ; v1(85.852,90.678) 85.852,90.746 86.106,91 86.106,91.694 86.614,92.202 86.614,94.996 86.403,95.207 86.403,103.506 86.193,103.717 v1(86.193,104.75) ; v1(121.158,84.43) 122.113,85.385 122.113,91.419 121.006,92.526 121.006,104.242 v1(121.412,104.648)
USB_OTG_FS_SOF: TP1.1 X3.3 | length 48.9
  Top Layer w0.203: v1(128.524,100.076) 128.563,100.115 131.985,100.115 X3.3@132.024,100.155 ; v1(128.524,134.874) 137.668,134.874 TP1.1@138.684,135.89
  Bottom Layer w0.203: v1(128.524,100.076) v1(128.524,134.874)
VSYNC: H1.40 J4.1 | length 9.7
  Top Layer w0.203: J4.1@110.236,37.084 110.236,38.862 111.004,39.63 H1.40@111.004,46.482
pads on no net: ENC1.MT1 ENC1.MT2 ENC2.1 ENC2.MT1 ENC2.MT2 H1.4 H1.5 H1.6 H1.7 H1.17 H1.18 H1.35 H1.36 H1.37 H1.38 H1.39 H1.MP1 J1.MP1 J1.MP2 J1.MP3 J1.MP4 R37.MT1 SW1. SW2. SW3. SW3.1 SW4. SW5. SW5.1 SW5.2 SW5.3 SW5.4 U1.36 U1.40 U2.36 U2.40 X1. X1.3 X1.5 X1.6 X1.7 X1.11 X1.12 X1.14 X1.18 X2. X2.5 X2.6 X2.7 X2.9 X2.10 X2.11 X2.12 X2.13 X2.14 X2.15 X2.18 X3. X3.1 X3.5 X3.11 X3.12 X3.14 X3.17 X4. X4.3 X4.4 X4.5 X4.6 X4.7 X4.9 X4.11 X4.12 X4.13 X4.16 X4.20 X5. X5.14 X5.16 X6. X7. X7.7 X7.11 X7.12 X7.13 X7.14 X7.15 X7.16 X7.17 X7.18 X7.19 X7.20 X8. X8.11 X8.12 X8.13 X8.14 X8.15 X8.16 X8.17 X8.18 X8.19 X8.20

## Polygon pours and split planes (outlines as drawn)
GND on Top Layer "NONET_L02_P-001" (solid, remove dead copper, pour order 1): 61.479,160.02 61.479,26.416 153.162,26.416 153.162,160.02
+5V on Top Layer "NONET_L02_P-001" (solid, remove dead copper, pour order 0): 69.342,103.378 70.104,102.616 74.676,102.616 75.692,103.632 78.74,103.632 78.994,103.886 78.994,106.172 75.184,109.982 70.866,109.982 69.342,108.458
GND on Bottom Layer "NONET_L02_P-001" (solid, remove dead copper, pour order 2): 61.479,160.02 61.479,26.67 153.162,26.67 152.908,26.924 152.908,160.02

## Silkscreen, mask and mechanical layers (free items; w line width, h text height)
Top Overlay:
  text "Param" at 102.746,140.254 h1.52 r90
  text "RGB current" at 150.634,138.582 h0.76 r90
  text "Up" at 115.238,137.254 h1.52 r90
  text "Dn" at 134.746,137.254 h1.52 r90
  text "USB_SOF" at 141.199,134.264 h0.76 r90
  text "N" at 139.746,115.254 h1.52 r90
  text "USART2" at 62.636,111.404 h0.76
  text "TX" at 62.636,110.134 h0.76
  text "RX" at 62.636,108.864 h0.76
  text "UART4" at 62.636,106.578 h0.76
  text "TX" at 62.636,105.308 h0.76
  text "RX" at 62.636,104.038 h0.76
  text "Y" at 139.746,95.254 h1.52 r90
  text "GND" at 62.342,88.634 h0.76
  text "-USART2-" at 62.636,81.94 h0.76
  text "Sel" at 139.746,81.254 h1.52 r90
  text "TX" at 62.636,80.67 h0.76
  text "RX" at 62.636,79.4 h0.76
  text "-UART4-" at 62.636,77.114 h0.76
  text "TX" at 62.636,75.844 h0.76
  text "RX" at 62.636,74.574 h0.76
  text "GND" at 62.342,59.678 h0.76
  text "-SPI1-" at 62.636,54.344 h0.76
  text "MISO" at 62.636,53.074 h0.76
  text "MOSI" at 62.636,51.804 h0.76
  text "SCK" at 62.636,50.534 h0.76
  text "NSS" at 62.636,49.264 h0.76
  text "TX" at 62.636,46.978 h0.76
  text "FootSW" at 139.746,46.254 h1.52 r90
  text "RX" at 62.636,45.708 h0.76
  text "VSYNC" at 105.308,36.474 h0.76
  text "TE" at 113.69,36.31 h0.76
  text "GND" at 62.382,35.802 h0.76
Board Shape:
  lines w0.1: 61.479,26.521 61.479,28.521 61.479,157.861 61.479,159.861 67.818,159.861 69.818,159.861 135.818,159.861 153,159.861 153,26.521 137.818,26.521 135.818,26.521 119.187,26.521 105.187,26.521 69.818,26.521 61.479,26.521

## Text inside footprints (layer, text, board x,y; h text height)
H1: Top Overlay "50" at 115.893,48.525 h0.64; Top Overlay "45" at 113.393,48.525 h0.64; Top Overlay "40" at 110.893,48.525 h0.64; Top Overlay "35" at 108.393,48.525 h0.64; Top Overlay "30" at 105.893,48.525 h0.64; Top Overlay "25" at 103.393,48.525 h0.64; Top Overlay "20" at 100.893,48.525 h0.64; Top Overlay "15" at 98.393,48.525 h0.64; Top Overlay "10" at 95.893,48.525 h0.64; Top Overlay "5" at 93.393,48.525 h0.64; Top Overlay "1" at 91.393,48.525 h0.64